# Altium PCB TN2020C.PCBDOC (part 1 of 2)
Units mil, origin at the board's own origin, x right, y up, seen from the top; angles counter-clockwise.
Board outline 6880.03 x 4310.03 mil, 2 copper layers (Top Layer, Bottom Layer); 174 components, 0 nets, 620 pads, 52 vias.
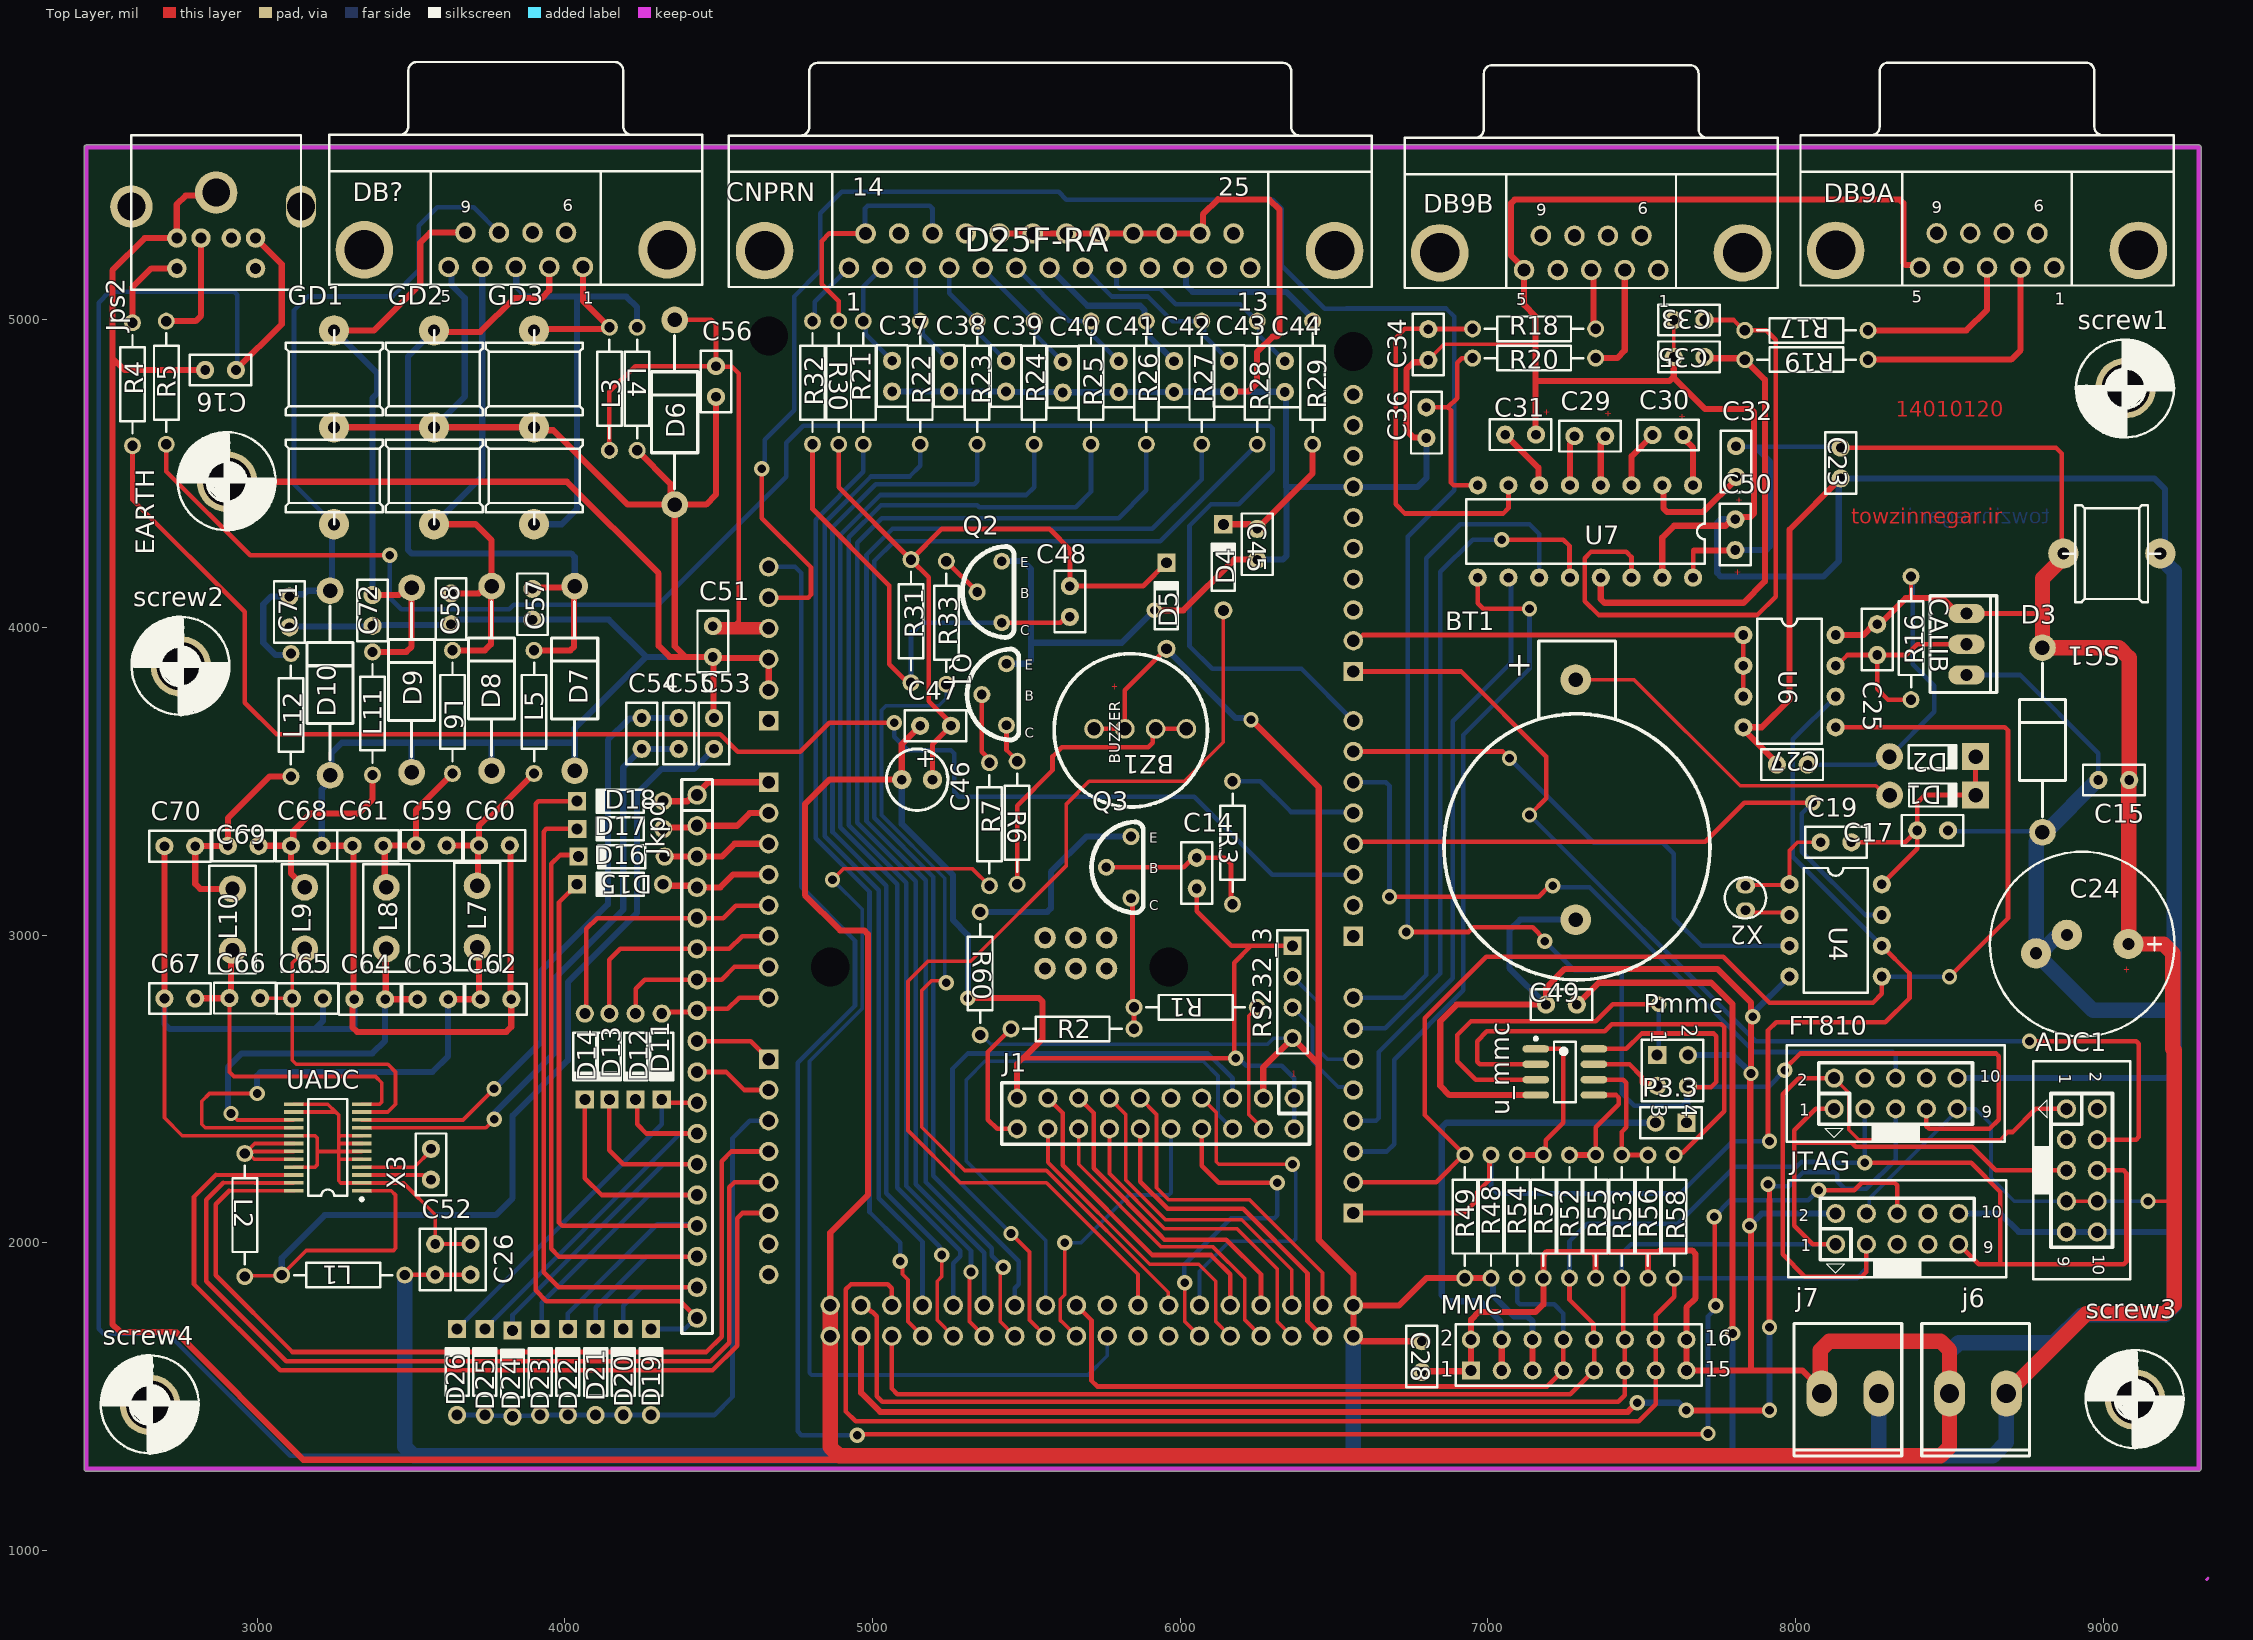
[diagram p0: Top Layer view]
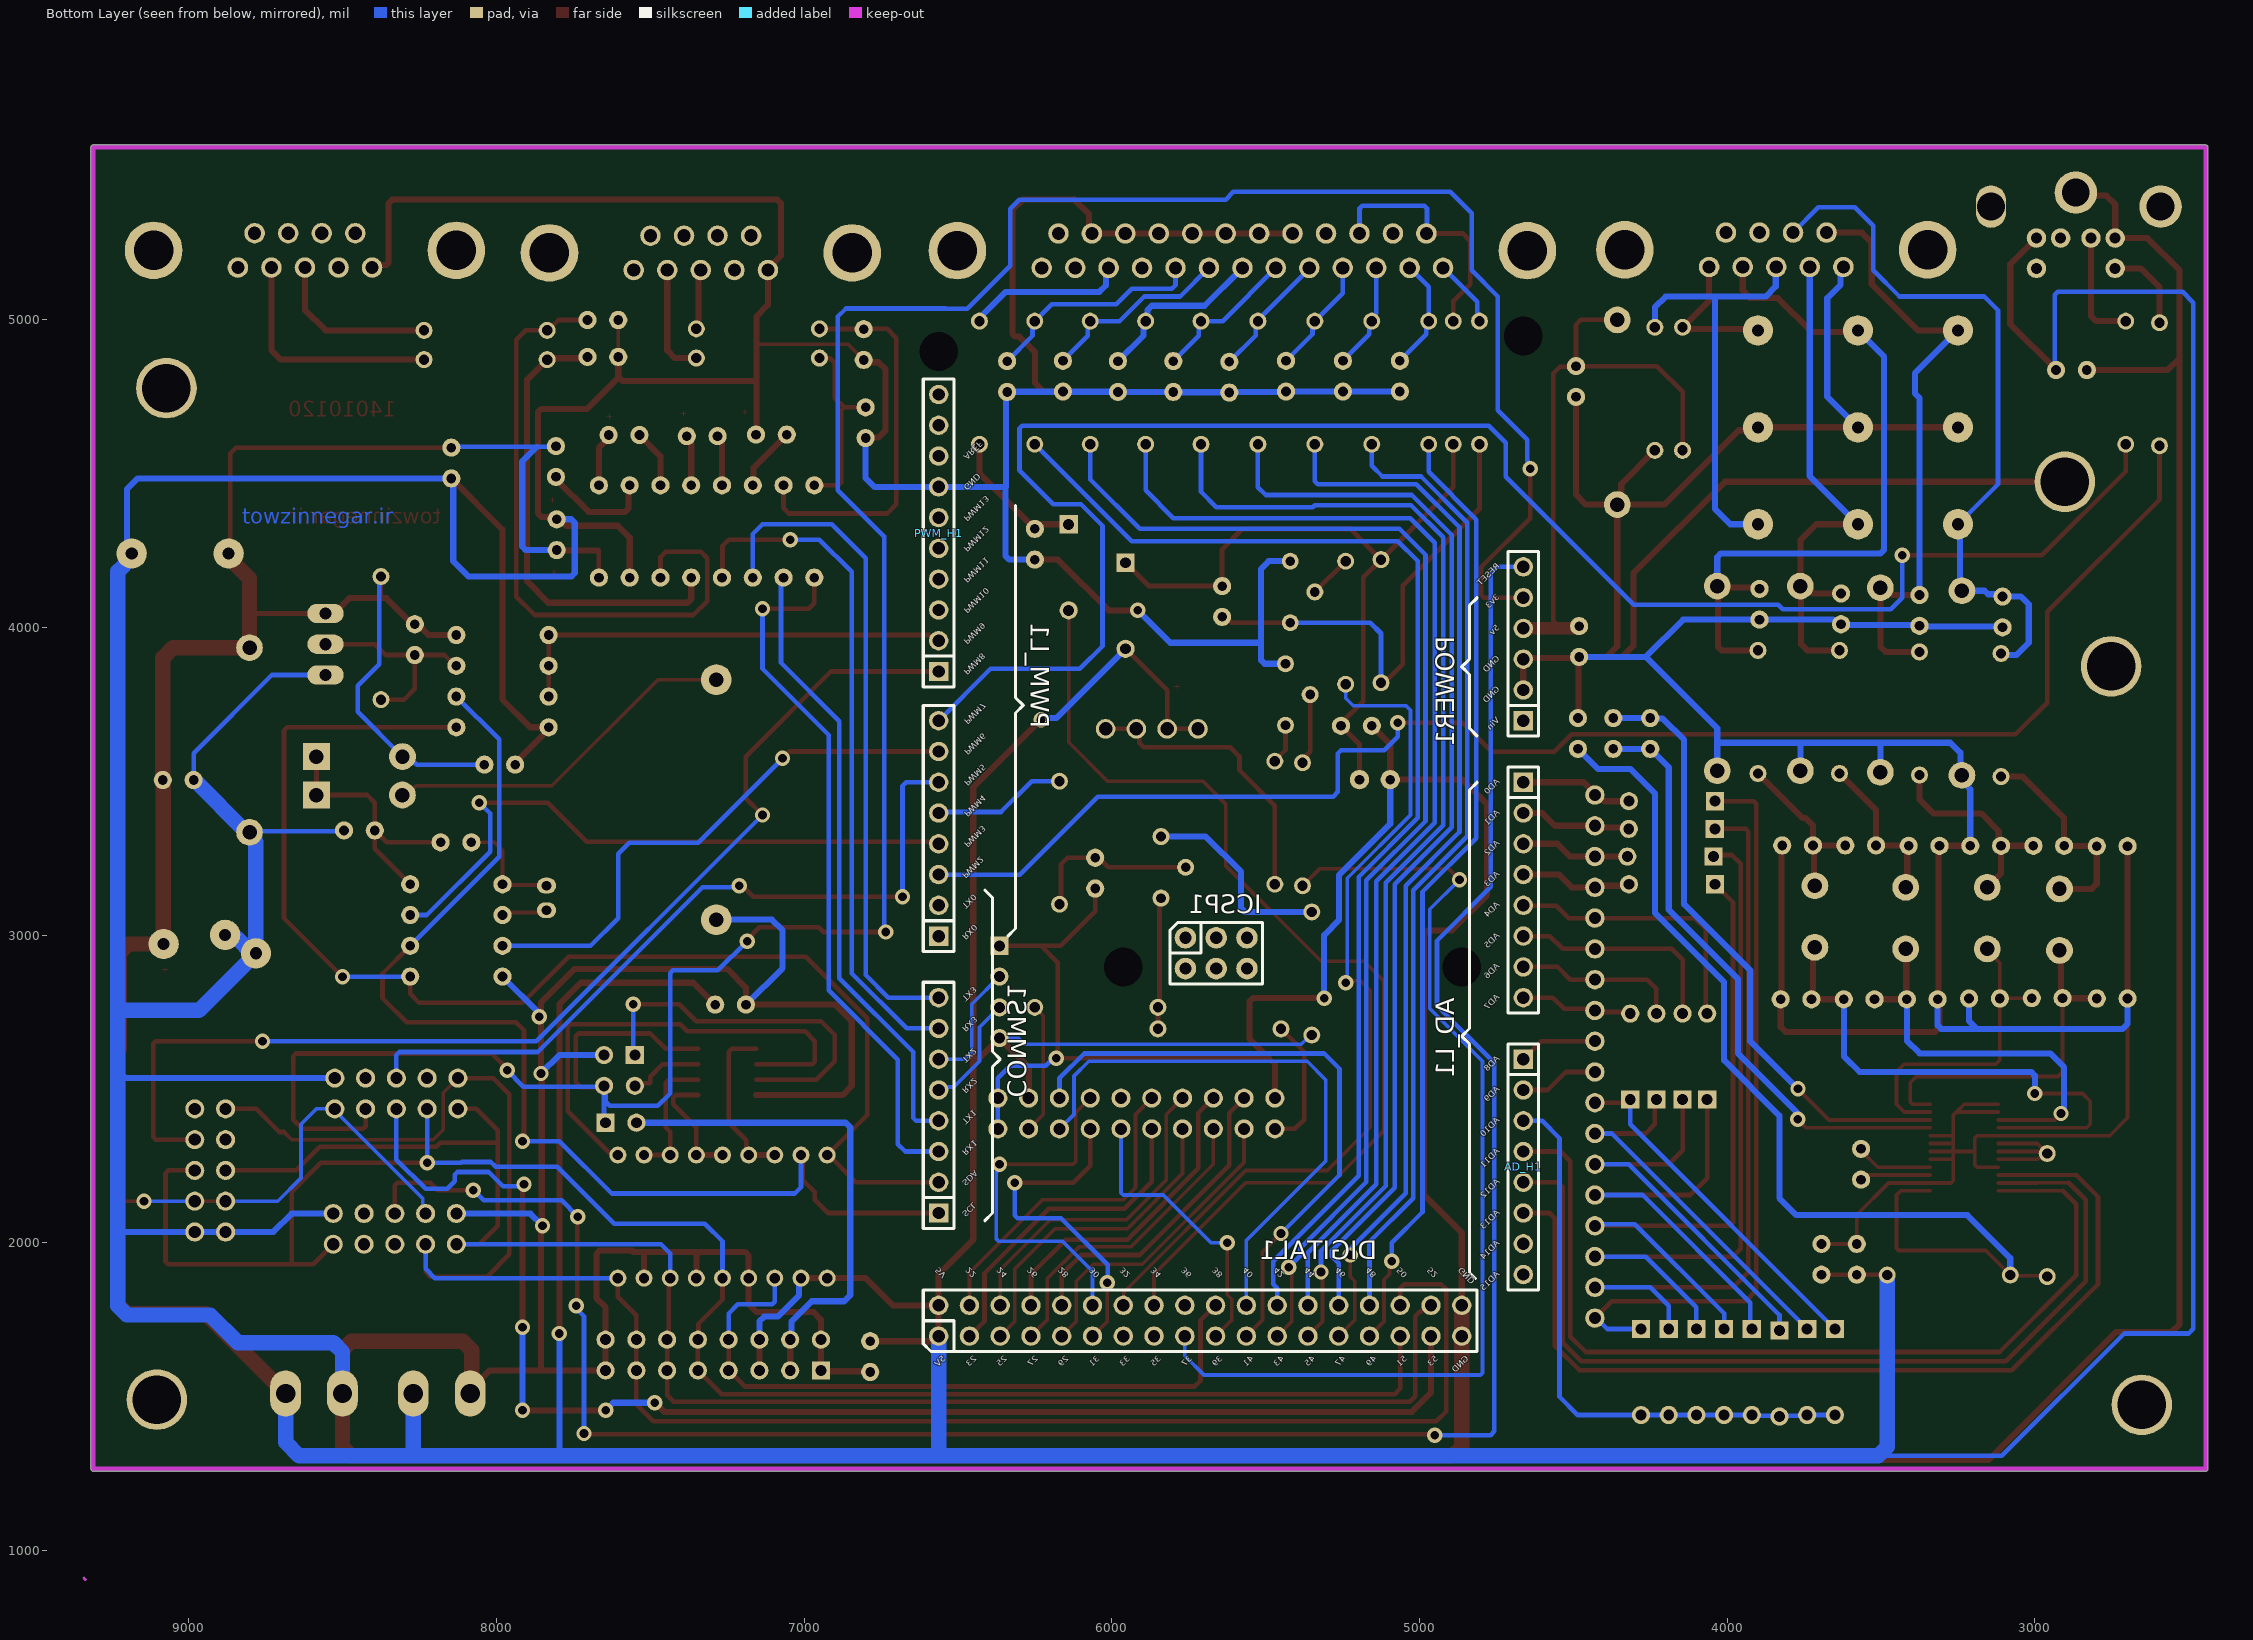
[diagram p1: Bottom Layer view, seen from below]

## Layer stack, top to bottom
Top Layer: signal copper 1.4
Dielectric: dielectric 12.6, FR-4, Dk 4.8
Bottom Layer: signal copper 1.4

## Board outline
2437.49,1265 ccw(c2445,1265) 2445,1257.48 9310,1257.48 ccw(c9310,1265) 9317.51,1265 9317.51,5560 ccw(c9310,5560) 9310,5567.52 2445,5567.52 ccw(c2445,5560) 2437.49,5560

## Design rules (kind name [scope] priority, off if disabled: settings)
Clearance [All] p1: gap=10
ComponentClearance [All] p1: gap=10 collisioncheckmode=3 verticalgap=10
DiffPairsRouting [All] p1: maxlimit=10 minlimit=1 mostfreqgap=10 toplayer_prefgap=5 bottomlayer_prefgap=5 maxuncoupledlength=500
HoleSize [All] p1: absolutevalues=TRUE maxlimit=160 minlimit=1 maxpercent=80.000 minpercent=20.000
PlaneConnect [All] p1: planeconnectstyle=Relief reliefexpansion=20 reliefentries=4 reliefconductorwidth=10 reliefairgap=6
PolygonConnect [All] p1: connectstyle=Relief reliefconductorwidth=10 reliefentries=4 polygonreliefangle="90 Angle"
RoomDefinition Tn2020B [InComponentClass('Tn2020B')] p1: confinementstyle=ConfineIn formatcopy=TRUE lockcomponents=FALSE outline 0,0 2000,0 2000,1000 0,1000
RoomDefinition Tn2020B2 [InComponentClass('Tn2020B2')] p2: confinementstyle=ConfineIn formatcopy=TRUE lockcomponents=FALSE outline 0,0 2000,0 2000,1000 0,1000
RoomDefinition arduino [InComponentClass('arduino')] p3: confinementstyle=ConfineIn formatcopy=TRUE lockcomponents=FALSE outline 0,0 2000,0 2000,1000 0,1000
RoomDefinition ADC [InComponentClass('ADC')] p4: confinementstyle=ConfineIn formatcopy=TRUE lockcomponents=FALSE outline 0,0 2000,0 2000,1000 0,1000
RoutingVias [All] p1: holewidth=28 width=50 viastyle="Through Hole" minholewidth=28 minwidth=50 maxholewidth=28 maxwidth=50
SMDNeckDown [All] p1: percent=30.000
SMDToPlane [All] p1: distance=0
SolderMaskExpansion [All] p1: expansion=4
TestPointUsage FabricationTestPointUsage [All] p1: valid=0 allowmultiple=FALSE
Testpoint FabricationTestpoint [All] p1: side=3 testpointundercomponent=TRUE minsize=40 maxsize=100 preferedsize=60 minholesize=0 maxholesize=40 preferedholesize=32 testpointgrid=1 style=297 order=0-112345678
Width [All] p1: maxlimit=50 minlimit=5 preferedwidth=10 toplayer_prefwidth=15 bottomlayer_prefwidth=15 minimp=50.000000 maximp=50.000000 favimp=50.000000
15 further rules are at their usual default settings.

## Classes and differential pairs
component class ADC: C52 C53 C54 C55 C56 C57 C58 C59 C60 C61 C62 C63 C64 C65 C66 C67 C68 C69 C70 C71 C72 D6 D7 D8 D9 D10 D11 D12 D13 D14 D15 D16 D17 D18 D19 D20 D21 D22 D23 D24 D25 D26 DB? GD1 GD2 GD3 Jkpd L1 L2 L3 L4 L5 L6 L7 L8 L9 L10 L11 L12 UADC X3
component class arduino: AD_H1 AD_L1 COMMS1 DIGITAL1 ICSP1 POWER1 PWM_H1 PWM_L1
component class Tn2020B: ADC1 C16 C49 C50 C51 EARTH FT810 Jps2 JTAG R4 R5 R52 R53 R54 R55 R56 R57 screw1 screw2 screw3 screw4
component class Tn2020B2: BT1 BZ1 C14 C15 C17 C19 C23 C24 C25 C26 C27 C28 C29 C30 C31 C32 C33 C34 C35 C36 C37 C38 C39 C40 C41 C42 C43 C44 C45 C46 C47 C48 CALIB CNPRN D1 D2 D3 D4 D5 DB9A DB9B J1 j6 j7 MMC P3.3 Pmmc Q1 Q2 Q3 R1 R2 R3 R6 R7 R16 R17 R18 R19 R20 R21 R22 R23 R24 R25 R26 R27 R28 R29 R30 R31 R32 R33 R48 R49 R58 R60 RS232_3 SG1 U4 U6 U7 u_mmc X2

## Components (designator, comment, footprint, x,y, rotation, side; value= is the part's Value field where it differs from the comment)
AD_H1 "AD_H" "Header 8x1 8.5mm" 4662.56,2596.49 r270 bottom locked
AD_L1 "AD_L" "Header 8x1 8.5mm" 4662.56,3496.49 r270 bottom locked
ADC1 "BOX PH2*5" IDC10 8939.9,2214.75 r270 top
BT1 "Battery" BATERY1 7198.38,3227.08 r90 top
BZ1 "BUZZER" BUZZER 5878.79,3687.33 r90 top
C14 "" RAD.1 6055,3205 r90 top
C15 "" RAD.1 9030,3505 r180 top
C16 "" RAD.1 2885,4835 r0 top
C17 "" RAD.1 8448.85,3338.74 r0 top
C19 "" RAD.1 8135,3300 r0 top
C23 "" RAD.1 8145,4530 r270 top
C24 "" RB.2.3/.6 8925,3000 r270 top
C25 "" RAD.1 8266.26,3963.85 r90 top
C26 "" RAD.1 3695,1950 r90 top
C27 "" RAD.1 7985,3555 r180 top
C28 "" RAD.1 6783.74,1626.15 r270 top
C29 "" RAD.1 7335,4620 r0 top
C30 "" RAD.1 7588.85,4623.74 r0 top
C31 "" RAD.1 7110,4625 r0 top
C32 "" RAD.1 7805,4535 r270 top
C33 "" RAD.1 7650,5000 r180 top
C34 "" RAD.1 6805,4915 r270 top
C35 "" RAD.1 7650,4880 r180 top
C36 "" RAD.1 6798.74,4661.15 r270 top
C37 "" RAD.1 5065,4820 r90 top
C38 "" RAD.1 5250,4820 r90 top
C39 "" RAD.1 5435,4820 r90 top
C40 "" RAD.1 5619.33,4816.73 r90 top
C41 "" RAD.1 5801.26,4818.85 r90 top
C42 "" RAD.1 5981.26,4818.85 r90 top
C43 "" RAD.1 6160,4820 r90 top
C44 "" RAD.1 6341.26,4818.85 r90 top
C45 "" RAD.1 6248.74,4266.15 r270 top
C46 "" RB.1/.2 5146.57,3512.47 r90 top
C47 "" RAD.1 5201.15,3681.26 r180 top
C48 "" RAD.1 5640,4080 r270 top
C49 "" RAD.1 7235,2775 r180 top
C50 "" RAD.1 7805,4305 r90 top
C51 "" RAD.1 4480,3950 r270 top
C52 "" RAD.1 3580,1950 r90 top
C53 "" RAD.1 4486.26,3658.85 r90 top
C54 "" RAD.1 4251.26,3658.85 r90 top
C55 "" RAD.1 4371.26,3658.85 r90 top
C56 "" RAD.1 4490,4795 r270 top
C57 "" RAD.1 3893.74,4071.15 r270 top
C58 "" RAD.1 3631.26,4063.85 r90 top
C59 "" RAD.1 3570,3290 r0 top
C60 "" RAD.1 3775,3290 r0 top
C61 "" RAD.1 3363.85,3288.74 r0 top
C62 "" RAD.1 3780,2790 r0 top
C63 "" RAD.1 3575,2790 r0 top
C64 "" RAD.1 3370,2790 r0 top
C65 "" RAD.1 3160,2795 r180 top
C66 "" RAD.1 2956.15,2796.26 r180 top
C67 "" RAD.1 2745,2795 r180 top
C68 "" RAD.1 3156.15,3291.26 r180 top
C69 "" RAD.1 2951.15,3291.26 r180 top
C70 "" RAD.1 2745,3290 r180 top
C71 "" RAD.1 3103.74,4046.15 r270 top
C72 "" RAD.1 3373.74,4051.15 r270 top
CALIB "Header 3" CALIB110 8560.47,3938.78 r270 top
CNPRN "" DCONNECTOR25 5608.62,5268.18 r0 top
COMMS1 "Communication" "Header 8x1 8.5mm" 6562.56,2096.49 r90 bottom
D1 "1N5817" DO-35#1 8445,3455 r0 top
D2 "1N5817" DO-35#1 8444.76,3580 r0 top
D3 "P6KE6V8" Diode0.6 8795,3650 r180 top
D4 "Diode 1N4148" DO-35#2 6140,4195 r90 top
D5 "1N5817" DO-35#2 5955,4070 r90 top
D6 "P6KE6V8" Diode0.6 4350,4715 r180 top
D7 "P6KE6V8" Diode0.6 4025,3850 r180 top
D8 "P6KE6V8" Diode0.6 3755,3850 r180 top
D9 "P6KE6V8" Diode0.6 3495,3845 r180 top
D10 "P6KE6V8" Diode0.6 3230,3835 r180 top
D11 "Diode 1N4148" DO-35#2 4315,2605 r270 top
D12 "Diode 1N4148" DO-35#2 4230,2605 r270 top
D13 "Diode 1N4148" DO-35#2 4145,2605 r270 top
D14 "Diode 1N4148" DO-35#2 4065,2605 r270 top
D15 "Diode 1N4148" DO-35#2 4179.76,3165 r180 top
D16 "Diode 1N4148" DO-35#2 4184.76,3255 r180 top
D17 "Diode 1N4148" DO-35#2 4180,3345 r180 top
D18 "Diode 1N4148" DO-35#2 4179.76,3435 r180 top
D19 "Diode 1N4148" DO-35#2 4280,1579.76 r90 top
D20 "Diode 1N4148" DO-35#2 4190,1580 r90 top
D21 "Diode 1N4148" DO-35#2 4100,1580 r90 top
D22 "Diode 1N4148" DO-35#2 4010,1580 r90 top
D23 "Diode 1N4148" DO-35#2 3920,1580 r90 top
D24 "Diode 1N4148" DO-35#2 3830,1575 r90 top
D25 "Diode 1N4148" DO-35#2 3740,1580 r90 top
D26 "Diode 1N4148" DO-35#2 3650,1580 r90 top
DB9A "" DCONNECTOR9M 8696.36,5518.1 r0 top
DB9B "" DCONNECTOR9M 7410,5510 r0 top
DB? "" DCONNECTOR9M 3915,5520 r0 top
DIGITAL1 "IO_36" "HEADER 36X 8MM" 6562.56,1696.49 r180 bottom locked
EARTH "EARTH" screw 2905,4470 r0 top
FT810 "BOX PH2*5" IDC10 8345.25,2494.9 r0 top
GD1 "GDT3" GDT3F 3242.36,4827.72 r90 top
GD2 "GDT3" GDT3F 3567.36,4827.72 r90 top
GD3 "GDT3" GDT3F 3892.36,4827.72 r90 top
ICSP1 "ICSP" ICSP 5760.59,2990.98 r270 bottom locked
J1 "" IDC20 5921.38,2406.73 r180 top
j6 "Header 2" PHW2 8585,1530 r90 top
j7 "Header 2" PHW2 8170,1530 r90 top
Jkpd "KEYPAD" SIP18 4442.11,2970.43 r270 top
Jps2 "PS2-6PIN" PS2-6PINb 2863.02,5415.04 r0 top
JTAG "BOX PH2*5" IDC10 8350.25,2054.9 r0 top
L1 "Ferritebead" AXIAL-0.4 3280,1895 r180 top
L2 "Ferritebead" AXIAL-0.4 2960,2090 r270 top
L3 "Ferritebead" AXIAL-0.4 4145,4775 r270 top
L4 "Ferritebead" AXIAL-0.4 4235,4775 r270 top
L5 "Ferritebead" AXIAL-0.4 3900,3725 r270 top
L6 "Ferritebead" AXIAL-0.4 3635,3725 r270 top
L7 "Inductor Isolated" RAD-0.2-izady 3720,3035 r180 top
L8 "Inductor Isolated" RAD-0.2-izady 3425,3030 r180 top
L9 "Inductor Isolated" RAD-0.2-izady 3160,3030 r180 top
L10 "Inductor Isolated" RAD-0.2-izady 2925,3025 r180 top
L11 "Ferritebead" AXIAL-0.4 3375,3720 r270 top
L12 "Ferritebead" AXIAL-0.4 3110,3715 r270 top
MMC "Header 8X2" HDR2X8 6945,1585 r0 top (schematic designator mmc)
P3.3 "Header 2" HDR1X2 7645,2390 r180 top
Pmmc "Header 2X2" HDR2X2 7550,2610 r270 top
POWER1 "POWER" "HEADER 6X1 8.5MM" 4662.56,3696.49 r90 bottom locked
PWM_H1 "IOH" "Header 10x1 8.5mm" 6562.56,3856.49 r90 bottom locked
PWM_L1 "PWM_L" "Header 8x1 8.5mm" 6562.56,2996.49 r90 bottom locked
Q1 "BC337-40" TREBC-IZADY 5430,3810 r180 top
Q2 "BC337-40" TREBC-IZADY 5414.59,4143.53 r180 top
Q3 "BC327" TREBC-IZADY 5834.59,3248.53 r180 top
R1 "" AXIAL-0.4 6050,2765 r0 top
R2 "" AXIAL-0.4 5650,2695 r180 top
R3 "" AXIAL-0.4 6170,3300 r270 top
R4 "" AXIAL-0.4 2595,4790 r270 top
R5 "" AXIAL-0.4 2705,4795 r270 top
R6 "" AXIAL-0.4 5470,3365 r90 top
R7 "" AXIAL-0.4 5380,3360 r90 top
R16 "" AXIAL-0.4 8375,3965 r270 top
R17 "" AXIAL-0.4 8035,4965 r0 top
R18 "" AXIAL-0.4 7150,4970 r0 top
R19 "" AXIAL-0.4 8035,4870 r0 top
R20 "" AXIAL-0.4 7150,4875 r0 top
R21 "" AXIAL-0.4 4970,4795 r90 top
R22 "" AXIAL-0.4 5155,4795 r90 top
R23 "" AXIAL-0.4 5340,4795 r90 top
R24 "" AXIAL-0.4 5525,4795 r90 top
R25 "" AXIAL-0.4 5710,4795 r90 top
R26 "" AXIAL-0.4 5890,4795 r90 top
R27 "" AXIAL-0.4 6070,4795 r90 top
R28 "" AXIAL-0.4 6250,4795 r90 top
R29 "" AXIAL-0.4 6430,4795 r90 top
R30 "" AXIAL-0.4 4890,4795 r90 top
R31 "" AXIAL-0.4 5125,4020 r270 top
R32 "" AXIAL-0.4 4805,4795 r90 top
R33 "" AXIAL-0.4 5240,4015 r90 top
R48 "" AXIAL-0.4 7010,2085 r90 top
R49 "" AXIAL-0.4 6925,2085 r90 top
R52 "" AXIAL-0.4 7265,2085 r90 top
R53 "" AXIAL-0.4 7435,2085 r90 top
R54 "" AXIAL-0.4 7095,2085 r90 top
R55 "" AXIAL-0.4 7350,2085 r270 top
R56 "" AXIAL-0.4 7520,2085 r270 top
R57 "" AXIAL-0.4 7180,2085 r270 top
R58 "" AXIAL-0.4 7605,2085 r270 top
R60 "" AXIAL-0.4 5350,2875 r90 top
RS232_3 "Header 4" HDR1X4 6365,2965 r270 top
screw1 "Socket" screw 9075,4780 r90 top
screw2 "Socket" screw 2755,3870 r0 top
screw3 "Socket" screw 9105.64,1487.22 r0 top
screw4 "Socket" screw 2655,1470 r0 top
SG1 "Spark Gap50V" "SPARK GAP" 9007.76,4277.64 r0 top
U4 "PCF8583P+SOCKET8PIN" DIP8 8114.2,3027.56 r270 top
U6 "24LC64-I/P" DIP8 7964.2,3837.56 r270 top
U7 "DS14C232CM" N016 7390,4300 r270 top
u_mmc "w25q64" SOIC8_N 7250,2555 r0 top
UADC "ISL26132" TSSOP24 3239.76,2329.57 r0 top
X2 "Crystal 32.768 kHz" R38 7830,3120 r180 top
X3 "X4.9152MHZ" RAD.1 3566.26,2258.85 r90 top

## Footprints (in the part's own frame and the unit in brackets; to place one, negate y for a bottom-side part, rotate by r counter-clockwise, add the part's x,y. Pads: shape width x height; smd on the part's side, far side on the other; paste and mask are expansions set on the pad)
AXIAL-0.4 [mm] "Axial Device, Thru-Hole; 2 Leads; 0.4 in Pin Spacing"
  round 1.4 hole 0.85: 1(-5.08,0) 2(5.08,0)
  silkscreen extent -4.06,-1.02 4.06,1.02
BATERY1 [mm]
  round 2.54 hole 1.2: 1(15.314,-2.2) 2(-4.498,-2.2)
  silkscreen extent -9.47,-13.29 18.49,8.67
BUZZER [mil]
  round 64 hole 43.31: 1(-17.33,158.79) 1(-17.33,58.79) 2(-17.33,-41.21) 2(-17.33,-141.21)
  silkscreen extent -271,-210 227,289
CALIB110 [mm]
  oval 1.6x3 hole 1: 1(2.382,-0.139) 2(-0.158,-0.139) 3(-2.698,-0.139)
  silkscreen extent -4.16,-3.14 3.84,2.36
DCONNECTOR9M [mm]
  round 1.69 hole 1.09: 1(3.65,-8.865) 2(0.88,-8.865) 3(-1.89,-8.865) 4(-4.66,-8.865) 5(-7.43,-8.865) 6(2.265,-6.025) 7(-0.505,-6.025) 8(-3.275,-6.025) 9(-6.045,-6.025)
  round 4.76 hole 3.26: 10(10.605,-7.445) 11(-14.385,-7.445)
  silkscreen extent -17.29,-10.34 13.51,8.06
DCONNECTOR25 [mm]
  round 1.69 hole 1.09: 1(-17.409,-2.54) 2(-14.648,-2.54) 3(-11.887,-2.54) 4(-9.126,-2.54) 5(-6.365,-2.54) 6(-3.604,-2.54) 7(-0.843,-2.54) 8(1.918,-2.54) 9(4.679,-2.54) 10(7.44,-2.54) 11(10.201,-2.54) 12(12.962,-2.54) 13(15.723,-2.54) 14(-16.028,0.3) 15(-13.267,0.3) 16(-10.506,0.3) 17(-7.745,0.3) 18(-4.984,0.3) 19(-2.223,0.3) 20(0.538,0.3) 21(3.299,0.3) 22(6.06,0.3) 23(8.821,0.3) 24(11.582,0.3) 25(14.343,0.3)
  round 4.76 hole 3.26: 26(-24.369,-1.12) 27(22.683,-1.12)
  Bottom Layer drawing of 1285 lines, arcs and shapes, not listed
  silkscreen extent -27.34,-4.12 25.76,14.38
Diode0.6 [mm]
  round 2.2 hole 1.2: A(-0.181,8.028) K(-0.181,-7.212)
  silkscreen extent -2.09,-5.94 1.72,6.76
DIP8 [mm]
  round 1.5 hole 0.8: 1(-3.491,-3.409) 2(-0.951,-3.409) 3(1.589,-3.409) 4(4.129,-3.409) 5(4.129,4.211) 6(1.589,4.211) 7(-0.951,4.211) 8(-3.491,4.211)
  silkscreen extent -4.83,-2.25 5.47,3.05
DO-35#1 [mil] "Diode, Axial; Body 3.8 x 1.9 mm (LxDia. max), Lead Dia. 0.53 mm (max)"
  round 87 hole 47: 1(-139.76,0)
  rect 87x87 hole 47: 2(139.76,0)
  silkscreen extent -77,-37 81,37
DO-35#2 [mil] "Diode, Axial; Body 3.8 x 1.9 mm (LxDia. max), Lead Dia. 0.53 mm (max)"
  round 59.06 hole 35.43: 1(-139.76,0)
  rect 59.06x59.06 hole 35.43: 2(139.76,0)
  silkscreen extent -77,-37 81,37
GDT3F [mm]
  round 2.5 hole 1: 1(3.486,-0.194) 2(-4.514,-0.194) 3(-12.515,-0.194)
  silkscreen extent -12.52,-4.21 3.49,3.79
HDR1X2 [mm] "Connector; Header; 2 Position"
  rect 1.5x1.5 hole 0.9: 1(0,0)
  round 1.5 hole 0.9: 2(2.54,0)
  silkscreen extent -1.27,-1.27 3.81,1.27
HDR1X4 [mm] "Connector; Header; 4 Position"
  rect 1.5x1.5 hole 0.9: 1(0,0)
  round 1.5 hole 0.9: 2(2.54,0) 3(5.08,0) 4(7.62,0)
  silkscreen extent -1.27,-1.27 8.89,1.27
HDR2X2 [mm] "Connector; Header; 2x2 Position"
  rect 1.5x1.5 hole 0.9: 1(0,0)
  round 1.5 hole 0.9: 2(0,2.54) 3(2.54,0) 4(2.54,2.54)
  silkscreen extent -1.27,-1.27 3.81,3.81
HDR2X8 [mm] "Connector; Header; 8x2 Position"
  rect 1.5x1.5 hole 0.9: 1(0,0)
  round 1.5 hole 0.9: 2(0,2.54) 3(2.54,0) 4(2.54,2.54) 5(5.08,0) 6(5.08,2.54) 7(7.62,0) 8(7.62,2.54) 9(10.16,0) 10(10.16,2.54) 11(12.7,0) 12(12.7,2.54) 13(15.24,0) 14(15.24,2.54) 15(17.78,0) 16(17.78,2.54)
  silkscreen extent -1.27,-1.27 19.05,3.81
"HEADER 6X1 8.5MM" [mil] "Stackable 6 pin header"
  rect 63x63 hole 40: 1(0,0)
  round 63 hole 40: 2(100,0) 3(200,0) 4(300,0) 5(400,0) 6(500,0)
  silkscreen extent -50,-50 550,50, body extent -50,-50 550,50, height 335
"Header 8x1 8.5mm" [mil] "Stackable 8 pin header"
  rect 63x63 hole 40: 1(0,0)
  round 63 hole 40: 2(100,0) 3(200,0) 4(300,0) 5(400,0) 6(500,0) 7(600,0) 8(700,0)
  silkscreen extent -50,-50 750,50, body extent -50,-50 750,50, height 335
"Header 10x1 8.5mm" [mil] "Stackable 10 pin header"
  rect 63x63 hole 40: 1(0,0)
  round 63 hole 40: 2(100,0) 3(200,0) 4(300,0) 5(400,0) 6(500,0) 7(600,0) 8(700,0) 9(800,0) 10(900,0)
  silkscreen extent -50,-50 950,50, body extent -50,-50 950,50, height 335
"HEADER 36X 8MM" [mil] "Stackable 10 pin header"
  round 63 hole 40: 1(0,0) 2(0,100) 3(100,0) 4(100,100) 5(200,0) 6(200,100) 7(300,0) 8(300,100) 9(400,0) 10(400,100) 11(500,0) 12(500,100) 13(600,0) 14(600,100) 15(700,0) 16(700,100) 17(800,0) 18(800,100) 19(900,0) 20(900,100) 21(1000,0) 22(1000,100) 23(1100,0) 24(1100,100) 25(1200,0) 26(1200,100) 27(1300,0) 28(1300,100) 29(1400,0) 30(1400,100) 31(1500,0) 32(1500,100) 33(1600,0) 34(1600,100) 35(1700,0) 36(1700,100)
  silkscreen extent -50,-50 1750,150, body extent -50,50 1750,250, height 335
ICSP [mil]
  round 70 hole 40: 1(0,0) 2(100,0) 3(0,100) 4(100,100) 5(0,200) 6(100,200)
  silkscreen extent -50,-50 150,250, body extent -50,-250 150,50, height 485
IDC10 [mil]
  round 62 hole 39.37: 1(-220.25,-59.9) 2(-220.25,40.1) 3(-120.25,-59.9) 4(-120.25,40.1) 5(-20.25,-59.9) 6(-20.25,40.1) 7(79.75,-59.9) 8(79.75,40.1) 9(179.75,-59.9) 10(179.75,40.1)
  silkscreen extent -375,-167 334,148
IDC20 [mil]
  round 62 hole 39.37: 1(-448.62,-63.27) 2(-448.62,36.73) 3(-348.62,-63.27) 4(-348.62,36.73) 5(-248.62,-63.27) 6(-248.62,36.73) 7(-148.62,-63.27) 8(-148.62,36.73) 9(-48.62,-63.27) 10(-48.62,36.73) 11(51.38,-63.27) 12(51.38,36.73) 13(151.38,-63.27) 14(151.38,36.73) 15(251.38,-63.27) 16(251.38,36.73) 17(351.38,-63.27) 18(351.38,36.73) 19(451.38,-63.27) 20(451.38,36.73)
  silkscreen extent -499,-113 501,87
N016 [mm]
  round 1.5 hole 0.8: 1(-4.101,7.026) 2(-4.101,4.486) 3(-4.101,1.946) 4(-4.101,-0.594) 5(-4.101,-3.134) 6(-4.101,-5.674) 7(-4.101,-8.214) 8(-4.101,-10.754) 9(3.519,-10.754) 10(3.519,-8.214) 11(3.519,-5.674) 12(3.519,-3.134) 13(3.519,-0.594) 14(3.519,1.946) 15(3.519,4.486) 16(3.519,7.026)
  silkscreen extent -2.94,-11.71 2.36,7.99
PHW2 [mil]
  oval 150x100 hole 62.99: N(-20,85) P(-20,-100)
  silkscreen extent -223,-175 207,175
PS2-6PINb [mm]
  round 1.6 hole 0.9: 1(-3.148,-6.311) 2(-3.148,-3.811) 3(-1.148,-3.811) 4(1.352,-3.811) 5(3.352,-3.811) 6(3.352,-6.311)
  round 3.5 hole 2.3: L(-6.898,-1.211) S(0.102,-0.061)
  oval 2.5x3.5 hole 2.3: R(7.103,-1.211)
  silkscreen extent -6.9,-8.06 7.1,4.69
R38 [mm]
  oval 1.6x1.3 hole 0.8: 1(-0.174,1.001) 2(-0.174,-1.031)
  silkscreen extent -1.87,-1.71 1.52,1.68
RAD-0.2-izady [mil]
  round 87 hole 47: 1(5,-125) 2(5,75)
  silkscreen extent -70,-200 80,150
RAD.1 [mm]
  round 1.5 hole 0.8: 1(1.172,0.032) 2(-1.368,0.032)
  silkscreen extent -2.64,-1.24 2.44,1.3
RB.1/.2 [mm]
  round 1.6 hole 0.8: 1(-0.19,-1.23) 2(-0.19,1.31)
  silkscreen extent -2.73,-2.5 2.35,2.58
RB.2.3/.6 [mm]
  round 2.5 hole 1: 1(0.745,3.97) 2(-0.017,-1.11) 2(1.507,-3.65)
  silkscreen extent -6.88,-7.46 8.36,7.78
screw [mm]
  round 5 hole 4: 1(-0.066,0.076)
  silkscreen extent -4.14,-3.92 3.94,4.17
SIP18 [mm]
  round 1.6 hole 1: 1(-12.308,-0.308) 2(-9.768,-0.308) 3(-7.228,-0.308) 4(-4.688,-0.308) 5(-2.148,-0.308) 6(0.392,-0.308) 7(2.932,-0.308) 8(5.472,-0.308) 9(8.012,-0.308) 10(10.552,-0.308) 11(13.092,-0.308) 12(15.632,-0.308) 13(18.172,-0.308) 14(20.712,-0.308) 15(23.252,-0.308) 16(25.792,-0.308) 17(28.332,-0.308) 18(30.872,-0.308)
  silkscreen extent -13.58,-1.58 32.14,0.96
SOIC8_N [mm] "SOIC, 8-Leads, Body 4.9x3.9mm, Pitch 1.27mm, IPC Medium Density"
  oval 2.2x0.6 smd: 1(-2.4,1.905) 2(-2.4,0.635) 3(-2.4,-0.635) 4(-2.4,-1.905) 5(2.4,-1.905) 6(2.4,-0.635) 7(2.4,0.635) 8(2.4,1.905)
  silkscreen extent -2.52,-2.5 0.9,2.88, body extent -2,-2.5 2,2.5, height 1.75
"SPARK GAP" [mm]
  round 2.5 hole 1: 1(4.502,-0.956) 2(-3.498,-0.956)
  silkscreen extent -3.5,-4.97 4.5,3.03
TREBC-IZADY [mm]
  round 1.4 hole 0.8: 1(-0.137,3.265) 2(1.895,0.725) 3(-0.137,-1.815)
  silkscreen extent -1.15,-3.03 3.12,4.48
TSSOP24 [mm]
  rect 1.6x0.3 smd: 1(2.546,-4.083) 2(2.546,-3.433) 3(2.546,-2.783) 4(2.546,-2.133) 5(2.546,-1.483) 6(2.546,-0.833) 7(2.546,-0.183) 8(2.546,0.467) 9(2.546,1.117) 10(2.546,1.767) 11(2.546,2.417) 12(2.546,3.067) 13(-3.054,3.067) 14(-3.054,2.417) 15(-3.054,1.767) 16(-3.054,1.117) 17(-3.054,0.467) 18(-3.054,-0.183) 19(-3.054,-0.833) 20(-3.054,-1.483) 21(-3.054,-2.133) 22(-3.054,-2.783) 23(-3.054,-3.433) 24(-3.054,-4.083)
  silkscreen extent -1.85,-4.91 2.67,3.49

## Part data
ADC1 FT810 JTAG: library part "Header 5X2", "Header, 5-Pin, Dual row"
BT1: "Multicell Battery"
BZ1: library part Speaker, "Loudspeaker"
C14 C15 C16 C17 C19 C23 C25 C26 C27 C28 C29 C30 C31 C32 C33 C34 C35 C36 C37 C38 C39 C40 C41 C42 C43 C44 C45 C47 C48 C49 C50 C51 C52 C53 C54 C55 C56 C57 C58 C59 C60 C61 C62 C63 C64 C65 C66 C67 C68 C69 C70 C71 C72: library part Cap, "Capacitor"
C24 C46: library part "Cap Pol1", "Polarized Capacitor (Radial)"
CALIB: "Header, 3-Pin"
CNPRN: library part "D Connector 25", "Receptacle Assembly, 25 Position, Right Angle"
D1 D2 D5: library part "Diode 1N4148", "High Conductance Fast Diode"
D3 D6 D7 D8 D9 D10: library part "D Varactor", "600 Watt Transient Voltage Suppressors"
D4 D11 D12 D13 D14 D15 D16 D17 D18 D19 D20 D21 D22 D23 D24 D25 D26: "High Conductance Fast Diode"
DB9A DB9B DB?: library part "D Connector 9", "Receptacle Assembly, 9 Position, Right Angle"
EARTH: library part Socket, "Socket"
GD1 GD2 GD3: library part "Cap Feed", "Feed-Through Capacitor"
J1: library part "Header 10X2", "Header, 10-Pin, Dual row"
j6 j7 P3.3: "Header, 2-Pin"
Jkpd: library part "Header 18", "Header, 18-Pin"
Jps2: "6 Pin Through Hole PS2 Socket (Kycon P/N)"
L1 L2 L3 L4 L5 L6 L11 L12: library part Inductor, "Inductor"
L7 L8 L9 L10: "Isolated Inductor"
MMC: "Header, 8-Pin, Dual row"
Pmmc: "Header, 2-Pin, Dual row"
Q1 Q2: library part NPN, "NPN Bipolar Transistor"
Q3: library part PNP, "PNP Bipolar Transistor"
R1 R2 R3 R4 R5 R6 R7 R16 R17 R18 R19 R20 R21 R22 R23 R24 R25 R26 R27 R28 R29 R30 R31 R32 R33 R48 R49 R52 R53 R54 R55 R56 R57 R58 R60: library part Res2, "Resistor"
RS232_3: "Header, 4-Pin"
SG1: library part "Fuse Thermal"
U4: library part "Header 4X2", "Header, 4-Pin, Dual row"
U6: "64Kbit, 400kHz, 2.5V, I2C Serial EEPROM, 8-Pin PDIP, Industrial Temperature"
U7: "Low-Power +5V Powered TIA/EIA-232 Dual Driver/Receiver, 16-pin Narrow SOIC"
X2 X3: library part XTAL, "Crystal Oscillator"

## Free pads (board coordinates)
  round 62.99 hole 125.98: 0(4662.56,4946.49) 0(4862.56,2896.49) 0(5962.56,2896.49) 0(6562.56,4896.49)

## Via types
v1: diameter 50, hole 28, Top Layer to Bottom Layer, 52 vias

## Nets (pads, with @x,y where several pads share a name; then routed paths per layer and width w, separated by ;. In a path a pad name is that pad's centre, name@x,y a point inside that pad or via, vN(x,y) a via of type N, cw(c..) or ccw(c..) an arc to the next point about the centre after c; other vN are vias at no path point)
pads on no net: AD_H1.1 AD_H1.2 AD_H1.3 AD_H1.4 AD_H1.5 AD_H1.6 AD_H1.7 AD_H1.8 AD_L1.1 AD_L1.2 AD_L1.3 AD_L1.4 AD_L1.5 AD_L1.6 AD_L1.7 AD_L1.8 ADC1.1 ADC1.2 ADC1.3 ADC1.4 ADC1.5 ADC1.6 ADC1.7 ADC1.8 ADC1.9 ADC1.10 BT1.1 BT1.2 BZ1.1 BZ1.2 C14.1 C14.2 C15.1 C15.2 C16.1 C16.2 C17.1 C17.2 C19.1 C19.2 C23.1 C23.2 C24.1 C24.2 C25.1 C25.2 C26.1 C26.2 C27.1 C27.2 C28.1 C28.2 C29.1 C29.2 C30.1 C30.2 C31.1 C31.2 C32.1 C32.2 C33.1 C33.2 C34.1 C34.2 C35.1 C35.2 C36.1 C36.2 C37.1 C37.2 C38.1 C38.2 C39.1 C39.2 C40.1 C40.2 C41.1 C41.2 C42.1 C42.2 C43.1 C43.2 C44.1 C44.2 C45.1 C45.2 C46.1 C46.2 C47.1 C47.2 C48.1 C48.2 C49.1 C49.2 C50.1 C50.2 C51.1 C51.2 C52.1 C52.2 C53.1 C53.2 C54.1 C54.2 C55.1 C55.2 C56.1 C56.2 C57.1 C57.2 C58.1 C58.2 C59.1 C59.2 C60.1 C60.2 C61.1 C61.2 C62.1 C62.2 C63.1 C63.2 C64.1 C64.2 C65.1 C65.2 C66.1 C66.2 C67.1 C67.2 C68.1 C68.2 C69.1 C69.2 C70.1 C70.2 C71.1 C71.2 C72.1 C72.2 CALIB.1 CALIB.2 CALIB.3 CNPRN.1 CNPRN.2 CNPRN.3 CNPRN.4 CNPRN.5 CNPRN.6 CNPRN.7 CNPRN.8 CNPRN.9 CNPRN.10 CNPRN.11 CNPRN.12 CNPRN.13 CNPRN.14 CNPRN.15 CNPRN.16 CNPRN.17 CNPRN.18 CNPRN.19 CNPRN.20 CNPRN.21 CNPRN.22 CNPRN.23 CNPRN.24 CNPRN.25 CNPRN.26 CNPRN.27 COMMS1.1 COMMS1.2 COMMS1.3 COMMS1.4 COMMS1.5 COMMS1.6 COMMS1.7 COMMS1.8 D1.1 D1.2 D2.1 D2.2 D3.A D3.K D4.1 D4.2 D5.1 D5.2 D6.A D6.K D7.A D7.K D8.A D8.K D9.A D9.K D10.A D10.K D11.1 D11.2 D12.1 D12.2 D13.1 D13.2 D14.1 D14.2 D15.1 D15.2 D16.1 D16.2 D17.1 D17.2 D18.1 D18.2 D19.1 D19.2 D20.1 D20.2 D21.1 D21.2 D22.1 D22.2 D23.1 D23.2 D24.1 D24.2 D25.1 D25.2 D26.1 D26.2 DB9A.1 DB9A.2 DB9A.3 DB9A.4 DB9A.5 DB9A.6 DB9A.7 DB9A.8 DB9A.9 DB9A.10 DB9A.11 DB9B.1 DB9B.2 DB9B.3 DB9B.4 DB9B.5 DB9B.6 DB9B.7 DB9B.8 DB9B.9 DB9B.10 DB9B.11 DB?.1 DB?.2 DB?.3 DB?.4 DB?.5 DB?.6 DB?.7 DB?.8 DB?.9 DB?.10 DB?.11 DIGITAL1.1 DIGITAL1.2 DIGITAL1.3 DIGITAL1.4 DIGITAL1.5 DIGITAL1.6 DIGITAL1.7 DIGITAL1.8 DIGITAL1.9 DIGITAL1.10 DIGITAL1.11 DIGITAL1.12 DIGITAL1.13 DIGITAL1.14 DIGITAL1.15 DIGITAL1.16 DIGITAL1.17 DIGITAL1.18 DIGITAL1.19 DIGITAL1.20 DIGITAL1.21 DIGITAL1.22 DIGITAL1.23 DIGITAL1.24 DIGITAL1.25 DIGITAL1.26 DIGITAL1.27 DIGITAL1.28 DIGITAL1.29 DIGITAL1.30 DIGITAL1.31 DIGITAL1.32 DIGITAL1.33 DIGITAL1.34 DIGITAL1.35 DIGITAL1.36 EARTH.1 FT810.1 FT810.2 FT810.3 FT810.4 FT810.5 FT810.6 FT810.7 FT810.8 FT810.9 FT810.10 GD1.1 GD1.2 GD1.3 GD2.1 GD2.2 GD2.3 GD3.1 GD3.2 GD3.3 ICSP1.1 ICSP1.2 ICSP1.3 ICSP1.4 ICSP1.5 ICSP1.6 J1.1 J1.2 J1.3 J1.4 J1.5 J1.6 J1.7 J1.8 J1.9 J1.10 J1.11 J1.12 J1.13 J1.14 J1.15 J1.16 J1.17 J1.18 J1.19 J1.20 j6.N j6.P j7.N j7.P Jkpd.1 Jkpd.2 Jkpd.3 Jkpd.4 Jkpd.5 Jkpd.6 Jkpd.7 Jkpd.8 Jkpd.9 Jkpd.10 Jkpd.11 Jkpd.12 Jkpd.13 Jkpd.14 Jkpd.15 Jkpd.16 Jkpd.17 Jkpd.18 Jps2.1 Jps2.2 Jps2.3 Jps2.4 Jps2.5 Jps2.6 Jps2.L Jps2.R Jps2.S JTAG.1 JTAG.2 JTAG.3 JTAG.4 JTAG.5 JTAG.6 JTAG.7 JTAG.8 JTAG.9 JTAG.10 L1.1 L1.2 L2.1 L2.2 L3.1 L3.2 L4.1 L4.2 L5.1 L5.2 L6.1 L6.2 L7.1 L7.2 L8.1 L8.2 L9.1 L9.2 L10.1 L10.2 L11.1 L11.2 L12.1 L12.2 MMC.1 MMC.2 MMC.3 MMC.4 MMC.5 MMC.6 MMC.7 MMC.8 MMC.9 MMC.10 MMC.11 MMC.12 MMC.13 MMC.14 MMC.15 MMC.16 P3.3.1 P3.3.2 Pmmc.1 Pmmc.2 Pmmc.3 Pmmc.4 POWER1.1 POWER1.2 POWER1.3 POWER1.4 POWER1.5 POWER1.6 PWM_H1.1 PWM_H1.2 PWM_H1.3 PWM_H1.4 PWM_H1.5 PWM_H1.6 PWM_H1.7 PWM_H1.8 PWM_H1.9 PWM_H1.10 PWM_L1.1 PWM_L1.2 PWM_L1.3 PWM_L1.4 PWM_L1.5 PWM_L1.6 PWM_L1.7 PWM_L1.8 Q1.1 Q1.2 Q1.3 Q2.1 Q2.2 Q2.3 Q3.1 Q3.2 Q3.3 R1.1 R1.2 R2.1 R2.2 R3.1 R3.2 R4.1 R4.2 R5.1 R5.2 R6.1 R6.2 R7.1 R7.2 R16.1 R16.2 R17.1 R17.2 R18.1 R18.2 R19.1 R19.2 R20.1 R20.2 R21.1 R21.2 R22.1 R22.2 R23.1 R23.2 R24.1 R24.2 R25.1 R25.2 R26.1 R26.2 R27.1 R27.2 R28.1 R28.2 R29.1 R29.2 R30.1 R30.2 R31.1 R31.2 R32.1 R32.2 R33.1 R33.2 R48.1 R48.2 R49.1 R49.2 R52.1 R52.2 R53.1 R53.2 R54.1 R54.2 R55.1 R55.2 R56.1 R56.2 R57.1 R57.2 R58.1 R58.2 R60.1 R60.2 RS232_3.1 RS232_3.2 RS232_3.3 RS232_3.4 screw1.1 screw2.1 screw3.1 screw4.1 SG1.1 SG1.2 U4.1 U4.2 U4.3 U4.4 U4.5 U4.6 U4.7 U4.8 U6.1 U6.2 U6.3 U6.4 U6.5 U6.6 U6.7 U6.8 U7.1 U7.2 U7.3 U7.4 U7.5 U7.6 U7.7 U7.8 U7.9 U7.10 U7.11 U7.12 U7.13 U7.14 U7.15 U7.16 u_mmc.1 u_mmc.2 u_mmc.3 u_mmc.4 u_mmc.5 u_mmc.6 u_mmc.7 u_mmc.8 UADC.1 UADC.2 UADC.3 UADC.4 UADC.5 UADC.6 UADC.7 UADC.8 UADC.9 UADC.10 UADC.11 UADC.12 UADC.13 UADC.14 UADC.15 UADC.16 UADC.17 UADC.18 UADC.19 UADC.20 UADC.21 UADC.22 UADC.23 UADC.24 X2.1 X2.2 X3.1 X3.2